# Altium PCB EMG_shield.PcbDoc (part 2 of 3)
Units mm, origin at the board's own origin, x right, y up, seen from the top; angles counter-clockwise.
Board outline 20.05 x 63.8 mm, 6 copper layers (Top Layer, GND/PWR1, SIG1, SIG2, GND/PWR2, Bottom Layer), stack 0.957 mm thick; 130 components, 175 nets, 615 pads, 662 vias.
Unrouted connection lines stored in the file: 5.
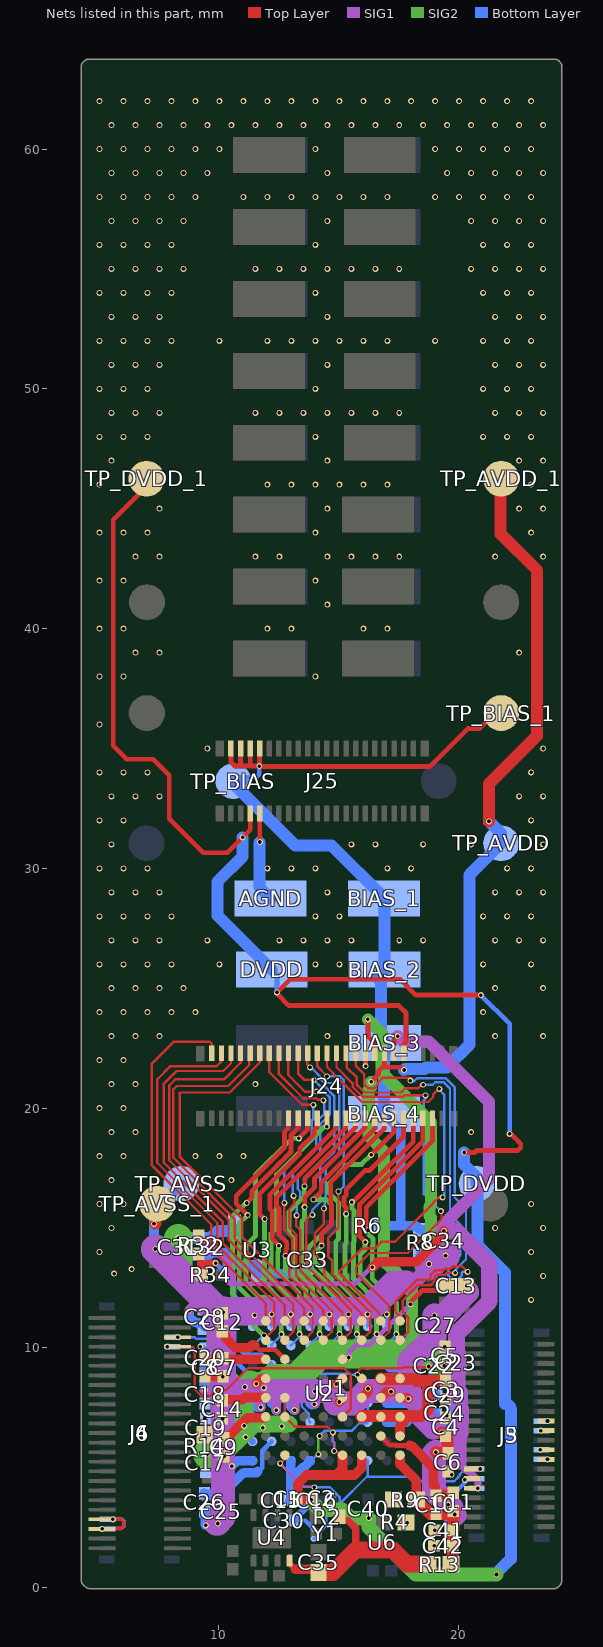
[diagram p6: the nets of this part, all layers, seen from the top]

## Via types
v1: diameter 0.25, hole 0.15, Top Layer to Bottom Layer, tented both sides, 585 vias
v2: diameter 0.25, hole 0.15, SIG2 to Bottom Layer, tented both sides, 41 vias
v3: diameter 0.25, hole 0.15, Top Layer to SIG1, tented both sides, 33 vias
v4: diameter 0.25, hole 0.15, Top Layer to Bottom Layer, 2 vias
v5: diameter 0.25, hole 0.15, Top Layer to GND/PWR1, tented both sides, 1 vias

## Nets (pads, with @x,y where several pads share a name; then routed paths per layer and width w, separated by ;. In a path a pad name is that pad's centre, name@x,y a point inside that pad or via, vN(x,y) a via of type N, cw(c..) or ccw(c..) an arc to the next point about the centre after c; other vN are vias at no path point) (continued)
-1.5V: C35.1 R2.2 R13.2 U4.4 | length 8.5
  Top Layer w0.25: U4.4@12.947,1.125 12.947,1 13.172,0.775 13.175,0.775
  Top Layer w0.3: R2.2@15.022,2.95 15.022,2.9 15.122,2.8 15.375,2.8 15.7,2.475 15.7,1.575
  Top Layer w0.4: 13.175,0.775 14.021,0.775 14.15,0.646 C35.1@14.15,0.625
  Top Layer w0.7: C35.1@14.15,0.625 14.152,0.627 14.752,0.627 15.7,1.575 17.253,1.575 17.839,0.989 18.71,0.989 18.718,0.981 R13.2@18.718,0.975
A_IN1N: J24.2 U1.H2 | length 16.4
  Top Layer w0.1: J24.2@10.1,22.29 10.1,21.941 9.909,21.75 7.975,21.75 7.425,21.2 7.425,17.724 9.929,15.221 9.929,14.274 12.3,11.902 12.3,10.78 11.9,10.38 11.9,10.375 U1.H2@11.95,10.325
A_IN1P: J24.1 U1.H1 | length 16
  Top Layer w0.1: J24.1@9.7,22.29 9.7,22.682 9.607,22.775 8.125,22.775 7.188,21.838 7.188,17.631 9.677,15.142 9.677,14.126 11.95,11.854 U1.H1@11.95,11.125
A_IN2N: J24.4 U1.G2 | length 16.7
  Top Layer w0.1: J24.4@10.9,22.29 10.9,21.893 10.207,21.2 8.177,21.2 7.925,20.948 7.925,17.825 10.339,15.411 10.398,15.352 10.398,14.524 13.1,11.821 13.1,10.675 U1.G2@12.75,10.325
A_IN2P: J24.3 U1.G1 | length 15.6
  Top Layer w0.1: J24.3@10.5,22.29 10.5,21.875 10.175,21.55 8.229,21.55 7.702,21.022 7.702,17.721 10.15,15.272 10.15,14.375 12.75,11.775 U1.G1@12.75,11.125
A_IN3N: J24.6 U1.F2 | length 17
  Top Layer w0.1: J24.6@11.7,22.29 11.7,21.901 10.449,20.65 8.382,20.65 8.358,20.626 8.358,17.985 10.978,15.365 10.978,14.605 13.9,11.683 13.9,10.675 U1.F2@13.55,10.325
A_IN3P: J24.5 U1.F1 | length 16
  Top Layer w0.1: J24.5@11.3,22.29 11.268,22.258 11.268,21.81 10.383,20.925 8.237,20.925 8.1,20.788 8.1,17.93 10.653,15.377 10.653,14.571 13.55,11.674 U1.F1@13.55,11.125
A_IN4N: J24.8 U1.E2 | length 14.7
  Top Layer w0.1: J24.8@12.5,22.29 12.5,21.579 12.5,21.421 13.511,20.41 14.052,20.41 14.108,20.354 14.322,20.354 v1(14.351,20.325) ; v1(13.114,16.341) 13.132,16.323 13.132,15.995 12.929,15.792 12.929,15.02 13.222,14.727 13.222,14.031 13.225,14.028 13.225,13.656 13.224,13.655 13.224,13.026 14.7,11.55 14.7,10.675 U1.E2@14.35,10.325
  Bottom Layer w0.1: v1(13.114,16.341) 13.081,16.373 13.081,17.325 14.05,18.294 14.05,19.414 14.388,19.753 14.388,20.313 14.376,20.325 v1(14.351,20.325)
A_IN4P: J24.7 U1.E1 | length 13.5
  Top Layer w0.1: J24.7@12.1,22.038 12.1,21.496 13.458,20.138 13.603,20.138 v1@13.938,20.138 ; v1(12.725,16.052) 12.725,14.915 13.047,14.593 13.047,13.959 13.05,13.956 13.05,13.728 13.047,13.725 13.047,13.656 12.929,13.537 12.929,12.997 14.35,11.576 U1.E1@14.35,11.125
  Top Layer w0.2: J24.7@12.1,22.038 J24.7@12.1,22.29
  Bottom Layer w0.1: v1(12.725,16.052) 12.725,17.504 13.875,18.654 13.875,19.487 13.938,19.55 v1(13.938,20.135)
A_IN5N: J24.10 U1.D2 | length 14.4
  Top Layer w0.1: J24.10@13.3,22.29 13.3,21.442 13.564,21.178 v1(13.958,21.178) ; v1(13.892,15.55) 13.85,15.55 13.85,15.539 13.839,15.539 13.635,15.335 13.635,13.448 15.5,11.584 15.5,10.675 U1.D2@15.15,10.325
  Bottom Layer w0.1: v1(13.892,15.55) 13.892,15.745 14.225,16.078 14.225,17.595 14.801,18.171 14.801,20.511 14.437,20.875 14.257,20.875 13.99,21.142 13.958,21.142 v1(13.958,21.178)
A_IN5P: J24.9 U1.D1 | length 13.8
  Top Layer w0.1: J24.9@12.89,22.285 12.89,22.179 12.89,21.388 13.6,20.677 14.051,20.677 v1(14.059,20.685) ; v1(13.242,15.525) 13.229,15.512 13.229,15.075 13.397,14.906 13.397,14.104 13.4,14.101 13.4,13.583 13.399,13.582 13.399,13.229 15.15,11.478 U1.D1@15.15,11.125
  Top Layer w0.2: J24.9@12.895,22.285 J24.9@12.9,22.29
  Bottom Layer w0.1: v1(13.242,15.525) 13.242,16.056 13.389,16.202 13.389,16.523 13.284,16.627 13.284,17.087 14.225,18.028 14.225,19.342 14.626,19.743 14.626,20.439 14.409,20.656 14.087,20.656 v1(14.059,20.685)
A_IN6N: J24.12 U1.C2 | length 13.9
  Top Layer w0.1: J24.12@14.1,22.29 14.09,22.28 14.09,21.751 14.491,21.35 14.491,21.34 v1(14.506,21.325) ; v1(14.986,16.524) 14.986,15.021 14.55,14.585 14.55,14.442 14.55,13.81 14.713,13.648 14.713,13.089 14.721,13.089 14.875,12.934 14.875,12.928 16.3,11.503 16.3,10.675 U1.C2@15.95,10.325
  Bottom Layer w0.1: v1(14.506,21.325) 15.045,21.325 15.2,21.17 15.2,16.738 v1(14.986,16.524)
A_IN6P: J24.11 U1.C1 | length 13.4
  Top Layer w0.1: J24.11@13.7,22.29 13.676,22.266 13.676,21.821 13.772,21.725 13.772,21.714 v1@13.815,21.671 ; v1(14.376,15.815) 14.376,15.173 14,14.796 14,13.904 14.4,13.504 14.385,13.489 14.385,12.99 15.95,11.425 U1.C1@15.95,11.125
  Bottom Layer w0.1: v1(13.797,21.697) 13.797,21.643 13.815,21.625 13.912,21.625 14.231,21.305 14.231,21.211 14.392,21.05 14.487,21.05 14.953,21.05 15.011,20.991 15.011,18.121 14.458,17.568 14.458,16.218 14.405,16.165 14.405,15.844 v1(14.376,15.815)
A_IN7N: J24.14 U1.B2 | length 18.6
  Top Layer w0.1: J24.14@14.9,22.29 14.9,21.707 15.575,21.032 15.575,20.89 15.99,20.475 17.668,20.475 17.723,20.53 18.569,20.53 v1(18.611,20.53) ; U1.B2@16.75,10.325 17.1,10.675 17.1,11.746 15.715,13.131 15.715,13.386 16.285,13.956 17.871,13.956 19.278,15.363 19.278,15.703 19.275,15.7 v1(19.254,15.7)
  Bottom Layer w0.1: v1(18.611,20.53) 18.576,20.495 18.623,20.448 18.623,20.402 18.546,20.325 18.546,16.409 v1(19.254,15.7)
A_IN7P: J24.13 U1.B1 | length 19.2
  Top Layer w0.1: J24.13@14.5,22.29 14.506,22.284 14.506,21.711 14.617,21.6 14.62,21.6 14.781,21.439 14.781,21.436 15.4,20.817 15.962,20.255 18.725,20.255 18.943,20.472 18.943,20.586 19.156,20.8 v1(19.189,20.8) ; U1.B1@16.75,11.125 16.693,11.182 16.693,11.43 15.023,13.1 15.023,13.211 15.962,14.15 15.985,14.15 15.981,14.146 15.988,14.138 16.216,14.138 16.227,14.15 16.504,14.15 16.775,14.421 17.328,14.421 18.931,16.023 18.931,16.041 19.165,16.275 v1(19.325,16.275)
  Bottom Layer w0.1: v1(19.189,20.8) 19.189,20.765 19.401,20.553 19.401,16.351 v1(19.325,16.275)
A_IN8N: J24.16 U1.A2 | length 18.7
  Top Layer w0.1: J24.16@15.7,22.29 15.7,21.773 16.053,21.421 16.053,21 16.228,20.825 16.466,20.825 16.622,20.981 16.622,21.052 16.845,21.275 17.958,21.275 17.983,21.25 v1(17.983,21.15) ; U1.A2@17.55,10.325 17.9,10.675 17.9,11.27 17.665,11.505 17.665,11.979 18.306,12.619 18.835,12.619 18.994,12.778 18.994,12.968 19.082,13.056 19.428,13.056 19.502,13.129 v1(19.85,13.13)
  Bottom Layer w0.1: v1(17.983,21.15) 18.033,21.2 18.108,21.125 18.141,21.125 18.266,21.25 18.708,21.25 19.45,21.25 19.826,20.874 19.826,16.281 20.3,15.807 20.3,13.699 19.879,13.277 19.879,13.158 v1(19.85,13.13)
A_IN8P: J24.15 U1.A1 | length 19.8
  Top Layer w0.1: J24.15@15.324,22.29 15.324,21.701 15.75,21.275 15.75,20.962 16.062,20.65 17.596,20.65 17.771,20.825 18.306,20.825 18.487,21.006 v1(18.518,20.975) ; U1.A1@17.55,11.125 17.55,11.305 17.344,11.511 17.344,11.922 18.272,12.85 18.819,12.85 18.819,13.041 19.009,13.231 19.356,13.231 19.429,13.304 19.636,13.304 19.736,13.405 20.128,13.405 20.358,13.175 v1(20.371,13.175)
  Top Layer w0.2: J24.15@15.3,22.29 J24.15@15.31,22.28
  Bottom Layer w0.1: v1(18.518,20.975) 18.918,20.975 19.018,21.075 19.378,21.075 19.636,20.816 19.636,15.564 20.066,15.134 20.066,13.864 19.568,13.365 19.568,13 19.579,13.012 19.736,12.855 19.738,12.855 19.966,12.854 20.127,13.016 20.127,13.134 20.168,13.175 v1(20.371,13.175)
A_VCAP1: C14.1 U1.H5 | length 1.9
  Top Layer w0.4: C14.1@10.142,7.819 10.158,7.835 10.978,7.835 11.089,7.945 11.93,7.945 U1.H5@11.95,7.925
A_VCAP2: C9.1 U1.H6 | length 2.1
  Top Layer w0.4: C9.1@10.206,6.275 10.228,6.298 10.398,6.298 11.195,7.095 11.92,7.095 U1.H6@11.95,7.125
A_VCAP3: C10.1 C11.1 U1.B7 | length 4.8
  Top Layer w0.2: U1.B7@16.75,6.325 17.125,5.95 17.359,5.95 17.384,5.925 17.716,5.925 17.719,5.929 17.946,5.929
  Top Layer w0.4: 17.946,5.929 17.95,5.925 18.027,5.925 18.931,5.021 18.931,4.301 19.014,4.218 19.014,3.865 C10.1@19.05,3.829 19.05,3.85 19.086,3.886 19.729,3.886 19.775,3.932 C11.1@19.775,3.954
A_VCAP4: C12.1 U1.G3 | length 3.3
  Top Layer w0.2: 11.486,10.114 11.675,9.925 12.35,9.925 U1.G3@12.75,9.525
  Top Layer w0.4: C12.1@10.142,10.69 10.178,10.654 10.178,10.632 10.278,10.533 10.278,10.41 10.688,10 11.268,10 11.382,10.114 11.486,10.114
A_VREFP: C7.1 C8.1 U1.H3 | length 2.6
  Top Layer w0.4: C8.1@9.417,9.572 9.417,9.561 9.453,9.525 U1.H3@11.95,9.525
A_WCT: C13.1 U1.D3 | length 5.8
  Top Layer w0.2: U1.D3@15.15,9.525 15.188,9.563 15.365,9.563 15.402,9.6 v3(15.415,9.6) ; v3(17.985,11.815) 17.985,11.907 18.472,12.394 19.278,12.394 C13.1@19.484,12.6
  SIG1 w0.2: v3(15.415,9.6) 15.425,9.61 15.425,9.833 15.717,10.125 16.296,10.125 v3(17.985,11.815)
ADS_A_DR: J4.22 J6.22 U1.D6 | length 11.6
  Top Layer w0.1: J4.22@8.275,10.05 8.301,10.024 8.918,10.024 8.95,9.991 8.95,9.829 8.991,9.788 8.991,8.273 9.298,7.966 9.583,7.966 9.844,8.226 10.284,8.226 11.208,9.15 15.22,9.15 15.5,8.87 15.5,7.475 U1.D6@15.15,7.125
  other v1: 7.85,10.05
ADS_B_DR: J4.23 J6.23 U2.D6 | length 8.2
  Bottom Layer w0.1: J6.23@8.055,10.45 v1(8.275,10.45) 8.976,10.45 9.046,10.38 9.715,10.38 9.95,10.145 9.95,8.9 10.8,8.05 13.145,8.05 13.45,7.745 13.45,7.555 13.755,7.25 13.755,6.945 U2.D6@13.8,6.9
ADS_BIAS: R32.2 R34.1 U2.B3 | length 7.3
  Top Layer w0.3: R32.2@9.15,13.921 9.236,13.835 9.236,13.43 ; R34.1@9.275,13.05 9.236,13.089 9.236,13.43 ; v1(9.86,13.536) 9.525,13.536 9.328,13.339 9.236,13.43
  Bottom Layer w0.2: v1(9.86,13.536) 10.625,12.771 10.625,10.2 11.125,9.7 11.8,9.7 U2.B3@12.2,9.3
AGND: AGND.37 C3.2 C4.1 C5.2 C6.1 C17.2 C18.1 C19.2 C20.1 C41.1 C42.1 J24.17 J25.34 R4.1 R9.2 | length 5.1
  Top Layer w0.18: v5(19.41,10.052) 19.423,10.052 C5.2@19.425,10.054 ; C4.1@19.45,7.082 19.459,7.091 19.459,7.134 v3(19.5,7.175) ; C3.2@19.45,7.871 v3(19.45,7.9) ; C6.1@19.55,4.846 19.567,4.846 v1(19.7,4.714)
  Top Layer w0.2: v1(11.7,31.1) J25.34@11.7,32.29 ; J24.17@16.099,22.366 16.106,22.359 16.106,21.756 v1(16.112,21.75)
  Top Layer w0.45: R9.2@17.271,3.675 v1(17.275,3.675) ; R4.1@17.8,2.725 17.825,2.725 v1(17.85,2.7) ; C42.1@18.968,1.75 v1(18.975,1.75) ; C41.1@18.996,2.4 v1(19,2.4)
  Bottom Layer w0.18: v1(9.225,10.055) 9.238,10.041 9.348,10.041 C20.1@9.417,9.972 ; v1(9.4,7.075) 9.421,7.054 C19.2@9.45,7.054 ; C18.1@9.417,7.683 9.417,7.658 v1(9.425,7.65)
  Bottom Layer w0.5: v1@11.684,31.084 11.684,29.216 AGND.37@12.15,28.75
  other v1: 23.018,12 23.518,13 5.625,13.1 6.358,13.285 5.018,14 23.018,14 5.518,15 21.518,15 23.518,15 5.018,16 6.018,16 23.018,16 5.518,17 10.518,17 5.018,18 6.018,18 9.018,18 10.018,18 11.018,18 5.518,19 6.518,19 20.518,19 5.018,20 6.018,20 5.518,21 6.518,21 11.518,21 5.018,22 6.018,22 5.518,23 6.518,23 7.518,23 14.518,23 21.518,23 23.518,23 5.018,24 6.018,24 7.018,24 8.018,24 9.018,24 21.018,24 5.518,25 6.518,25 7.518,25 8.518,25 21.518,25 23.518,25 5.018,26 6.018,26 7.018,26 8.018,26 10.018,26 14.018,26 15.018,26 21.018,26 23.018,26 5.518,27 6.518,27 7.518,27 9.518,27 12.518,27 13.518,27 14.518,27 15.518,27 17.518,27 18.518,27 21.518,27 22.518,27 23.518,27 5.018,28 6.018,28 7.018,28 8.018,28 14.018,28 15.018,28 21.018,28 22.018,28 23.018,28 5.518,29 6.518,29 7.518,29 14.518,29 21.518,29 22.518,29 23.518,29 5.018,30 6.018,30 7.018,30 12.018,30 13.018,30 14.018,30 17.018,30 18.018,30 22.018,30 23.018,30 5.518,31 15.518,31 16.518,31 18.518,31 20.518,31 23.518,31 5.018,32 6.018,32 23.018,32 5.518,33 6.518,33 7.518,33 22.518,33 23.518,33 5.018,34 6.018,34 7.018,34 23.018,34 9.518,35 23.518,35 5.018,36 5.018,38 6.018,38 14.018,38 6.518,39 7.518,39 22.518,39 5.018,40 6.018,40 12.018,40 13.018,40 16.018,40 17.018,40 14.518,41 5.018,42 6.018,42 14.018,42 6.518,43 7.518,43 11.518,43 12.518,43 14.518,43 15.518,43 16.518,43 17.518,43 21.518,43 23.518,43 5.018,44 6.018,44 7.018,44 14.018,44 23.018,44 7.518,45 14.518,45 22.518,45 23.518,45 5.018,46 12.018,46 13.018,46 14.018,46 15.018,46 16.018,46 17.018,46 23.018,46 5.518,47 14.518,47 22.518,47 23.518,47 5.018,48 6.018,48 7.018,48 14.018,48 21.018,48 22.018,48 23.018,48 5.518,49 6.518,49 7.518,49 11.518,49 12.518,49 13.518,49 14.518,49 15.518,49 16.518,49 17.518,49 21.518,49 22.518,49 23.518,49 5.018,50 6.018,50 7.018,50 14.018,50 21.018,50 22.018,50 23.018,50 5.518,51 6.518,51 7.518,51 14.518,51 21.518,51 22.518,51 23.518,51 5.018,52 6.018,52 7.018,52 8.018,52 10.018,52 12.018,52 13.018,52 14.018,52 15.018,52 16.018,52 17.018,52 19.018,52 21.018,52 22.018,52 23.018,52 5.518,53 6.518,53 7.518,53 14.518,53 21.518,53 22.518,53 23.518,53 5.018,54 6.018,54 7.018,54 8.018,54 14.018,54 21.018,54 22.018,54 23.018,54 5.518,55 6.518,55 7.518,55 8.518,55 11.518,55 12.518,55 13.518,55 14.518,55 15.518,55 16.518,55 17.518,55 20.518,55 21.518,55 22.518,55 23.518,55 5.018,56 6.018,56 7.018,56 8.018,56 14.018,56 21.018,56 22.018,56 23.018,56 5.518,57 6.518,57 7.518,57 8.518,57 14.518,57 20.518,57 21.518,57 22.518,57 23.518,57 5.018,58 6.018,58 7.018,58 8.018,58 9.018,58 11.018,58 12.018,58 13.018,58 14.018,58 15.018,58 16.018,58 17.018,58 19.018,58 20.018,58 21.018,58 22.018,58 23.018,58 5.518,59 6.518,59 7.518,59 8.518,59 9.518,59 14.518,59 19.518,59 20.518,59 21.518,59 22.518,59 23.518,59 5.018,60 6.018,60 7.018,60 8.018,60 9.018,60 10.018,60 14.018,60 19.018,60 20.018,60 21.018,60 22.018,60 23.018,60 5.518,61 6.518,61 7.518,61 8.518,61 9.518,61 10.518,61 11.518,61 12.518,61 13.518,61 14.518,61 15.518,61 16.518,61 17.518,61 18.518,61 19.518,61 20.518,61 21.518,61 22.518,61 23.518,61 5.018,62 6.018,62 7.018,62 8.018,62 9.018,62 10.018,62 11.018,62 12.018,62 13.018,62 14.018,62 15.018,62 16.018,62 17.018,62 18.018,62 19.018,62 20.018,62 21.018,62 22.018,62 23.018,62
AVDD: C3.1 C5.1 C17.1 C19.1 C31.1 C32.1 J24.19 R14.1 TP_AVDD.41 TP_AVDD_1.41 U1.A4 U1.A6 U1.A7 U1.B4 U1.B6 U1.C6 U2.A4 U2.A6 U2.A7 U2.B4 U2.B6 U2.C6 U3.1 | length 81.1
  Top Layer w0.2: v1(16.347,21.1) 16.65,21.403 16.65,21.539 16.812,21.701 ; J24.19@16.9,22.29 16.9,21.789 16.812,21.701 ; v1(17.72,21.59) 17.609,21.701 16.9,21.701 16.812,21.701
  Top Layer w0.3: U1.C6@15.95,7.098 U1.C6@15.95,7.125 ; U1.B6@16.75,7.098 U1.B6@16.75,7.125 ; U1.A7@17.55,6.325 U1.A7@17.569,6.344 ; U1.A6@17.55,7.098 U1.A6@17.55,7.125 ; U1.A4@17.55,8.725 U1.A4@17.569,8.706
  Top Layer w0.4: U1.A7@17.55,6.325 17.55,6.75 17.95,7.15 ; C5.1@19.437,9.284 19.437,8.641 C3.1@19.45,8.629
  Top Layer w0.5: U1.C6@15.95,7.125 15.975,7.15 17.95,7.15 18.432,7.15 18.725,7.443 18.725,8.379 18.975,8.629 ; U1.B4@16.75,8.725 16.775,8.7 18.175,8.7 18.246,8.629 18.975,8.629 ; C3.1@19.45,8.629 18.975,8.629 ; v1(21.26,31.96) 21.26,33.524 23.261,35.525 23.266,35.525 23.266,42.426 21.742,43.95 21.742,46.098 TP_AVDD_1.41@21.844,46.2
  SIG2 w0.5: v1(9.425,6.225) 9.425,5.656 v2(9.506,5.575) ; v1(16.347,21.1) 16.347,20.867 16.243,20.763 16.243,18.823 16.875,18.191 16.875,14.139 16.837,14.102 16.837,13.688 18.05,12.475 18.05,10.55 18.85,9.75
  SIG2 w0.7: v2@11.125,6.825 12.925,6.825 ; 11.306,8.45 11.753,8.45
  SIG2 w1.2: v2(8.3,14.575) 8.3,13.175 10.075,11.4 10.075,8.744 10.838,7.981 ; v2(9.506,5.575) 9.875,5.575 v2(11.05,6.75) v2@11.125,6.825 ; 10.838,6.825 10.838,7.981 ; 11.306,8.45 10.838,7.981 ; v2(11.867,8.336) 12.256,8.725 13.225,8.725 14.25,9.75 18.85,9.75 v1@19.346,9.254
  Bottom Layer w0.3: v2(11.05,6.75) 11.181,6.881 11.381,6.881 U2.A6@11.4,6.9 ; v2(11.082,8.368) 11.268,8.368 U2.A4@11.4,8.5 ; v2(11.109,6.278) 11.222,6.278 U2.A7@11.4,6.1 ; v2(11.825,6.675) 12.05,6.9 U2.B6@12.2,6.9 ; v2(11.867,8.336) 12.031,8.5 U2.B4@12.2,8.5 ; v2(12.625,6.725) 12.798,6.725 12.973,6.9 U2.C6@13,6.9
  Bottom Layer w0.4: v2(8.3,14.575) C31.1@8.3,14.579
  Bottom Layer w0.5: v2(8.3,14.575) 8.304,14.579 C32.1@9.4,14.579 9.408,14.586 9.657,14.586 9.95,14.879 10.631,14.879 10.65,14.898 U3.1@10.65,14.93 ; v1(9.425,6.225) 9.436,6.214 9.436,5.586 9.444,5.579 C17.1@9.45,5.579 9.45,5.575 v2(9.506,5.575) ; v1(17.72,21.59) 17.755,21.625 18.565,21.625 18.64,21.7 19.504,21.7 20.447,22.643 20.447,29.729 TP_AVDD.41@21.768,31.05 21.768,31.452 v1(21.26,31.96)
  other v1: 19.401,9.254
AVSS: C4.2 C6.2 C7.2 C8.2 C9.2 C10.2 C11.2 C12.2 C13.2 C14.2 C18.2 C20.2 C22.2 C23.2 C24.2 C25.2 C26.2 C27.2 C28.2 C29.2 C31.2 C32.2 C33.2 C34.2 C41.2 C42.2 J3.30 J5.30 J24.18 R8.1 R9.1 R13.1 TP_AVSS.42 TP_AVSS_1.42 U1.A5 U1.A8 U1.B5 U1.C5 U1.D4 U1.D5 U1.H4 U2.A5 U2.A8 U2.B5 U2.C5 U2.D4 U2.D5 U2.H4 U3.3 | length 98.7
  Top Layer w0.18: v1(20.25,4.5) 20.26,4.5 20.31,4.55 J3.30@20.56,4.55
  Top Layer w0.2: v1(16.21,23.7) 16.21,23 16.5,22.71 J24.18@16.5,22.29
  Top Layer w0.4: v1(7.29,15.175) 7.348,15.117 7.4,15.17 TP_AVSS_1.42@7.4,15.988 ; C8.2@9.4,8.798 C8.2@9.417,8.815 10.135,8.815 v3(10.15,8.8) ; C14.2@10.106,7.119 10.142,7.083 C14.2@10.142,7.061 10.142,7.058 v3(10.15,7.05) ; C12.2@10.142,11.447 10.175,11.48 v3(10.175,11.486) ; C9.2@10.192,5.461 C9.2@10.192,5.483 10.217,5.483 v3(10.225,5.475) ; v3(11.55,8.5) 11.775,8.725 U1.H4@11.95,8.725 ; v3(14.897,8.484) 14.909,8.484 U1.D4@15.15,8.725 ; v3(15.023,7.742) 15.15,7.87 U1.D5@15.15,7.925 ; U1.C5@15.95,7.925 16.215,8.19 v3(16.215,8.301) ; U1.B5@16.75,7.925 17,8.175 v1(17.175,8.175) ; U1.A8@17.55,5.525 17.55,5.15 18.229,4.471 R9.1@18.229,3.675 ; U1.A5@17.55,7.925 17.85,7.925 v3(17.9,7.875) ; C13.2@20.316,12.6 v3(20.325,12.6)
  Top Layer w0.5: R9.1@18.229,3.675 18.25,3.675 18.336,3.589 18.336,3.553 18.811,3.079 19.042,3.079 C10.2@19.05,3.071 19.058,3.079 19.652,3.079 C11.2@19.761,3.189 ; v3(19.042,5.652) 19.083,5.611 19.542,5.611 C6.2@19.55,5.604 19.544,5.604 19.536,5.611 19.536,6.245 19.456,6.325 C4.2@19.45,6.325 v1(19.3,6.474) ; R13.1@19.675,0.975 19.746,1.046 19.746,2.392 C41.2@19.754,2.4 19.754,2.406 19.775,2.428 C11.2@19.775,3.079 ; C11.2@19.775,3.196 19.825,3.146 v3(19.825,3.05)
  SIG1 w0.4: v1(8.757,11.551) 9.143,11.937 9.537,11.937 ; v1(9.412,8.241) 9.666,8.241 v3@10.15,8.725 ; 11.675,8.2 11.76,8.115 11.76,7.825 11.746,7.81 v1(11.746,7.52) ; 12.325,8.2 12.389,8.136 v1(12.389,7.4) ; 13.125,8.2 13.15,8.175 v1(13.15,7.4) ; v1(13.975,7.65) 14.003,7.678 v1@14.003,8.072
  SIG1 w0.5: 18.95,6.675 19.099,6.675 v1(19.3,6.474)
  SIG1 w0.6: 17.825,12.925 17.2,12.925 15.8,11.525 16.55,11.525 17.55,12.525 17.925,12.525 18.575,13.175 18.575,13.24 v1@18.76,13.425
  SIG1 w1: v1@9.875,2.675 v1(9.95,2.675) 10.175,2.9 10.175,5.45 10.15,5.475 v3(10.15,7.05) v3@10.15,8.725 ; v3(10.15,8.8) v3@10.15,8.725 ; 14.85,7.675 15.603,7.675 16.128,8.2 17.825,8.2 18.388,7.637 18.388,7.237 18.95,6.675 ; v3(15.023,7.742) 14.565,8.2 13.125,8.2 12.325,8.2 11.675,8.2 10.675,8.2 v3@10.15,8.725 ; 17.925,8.1 17.925,9.425 18.983,10.483 v1(18.983,11.359) ; v3(19.042,5.652) 18.975,5.585 18.975,4.04 v1(19.554,3.461) ; 19.2,11.175 20.35,12.325 ; v1@19.559,3.466 v1(19.554,3.461) ; v3(19.825,3.05) 19.69,3.185 19.69,3.326 v1(19.554,3.461)
  SIG1 w1.2: v1(7.35,14.125) 9.925,11.55 v3@10.214,11.55 ; v3@10.1,8.85 v3@10.1,11.4 ; v3@10.214,11.525 15.8,11.525 ; v1(18.76,13.5) 18.76,13.425 19.185,13.85 v1(19.448,13.85)
  SIG2 w0.5: v1(16.21,23.7) 16.56,23.35 16.575,23.35 16.775,23.15 16.775,21.485 18.85,19.41 18.85,15.968 18.779,15.897 18.779,15.503 18.85,15.432 18.85,14.625 19.448,14.027 v1(19.448,13.85)
  Bottom Layer w0.18: v1(19.554,3.461) 19.568,3.475 19.568,3.686 20.431,4.55 J5.30@20.745,4.55 ; v1(20.25,4.5) 20.269,4.5 20.294,4.525 J5.30@20.505,4.525
  Bottom Layer w0.4: TP_AVSS.42@8.458,16.825 8.317,16.684 7.29,15.657 7.29,15.025 7.29,14.185 7.412,14.062 7.438,14.062 7.475,14.025 7.935,14.025 7.939,14.021 8.101,14.021 C31.2@8.3,13.821 C32.2@9.4,13.821 9.4,13.843 9.436,13.879 9.601,13.879 9.684,13.961 10.239,13.961 10.736,13.464 11.536,13.464 11.6,13.401 11.6,13.1 13.5,13.1 13.642,13.242 13.664,13.242 13.7,13.279 C33.2@13.7,13.3 ; v1(8.757,11.551) 8.757,11.288 8.97,11.075 9.06,11.075 9.11,11.025 9.294,11.025 9.4,10.919 C28.2@9.4,10.884 ; C26.2@9.392,3.186 9.428,3.15 9.428,2.622 v1(9.45,2.6) ; v1(9.412,8.241) 9.417,8.246 C18.2@9.417,8.44 C20.2@9.417,9.215 ; v1(9.95,2.675) 9.975,2.675 C25.2@10.1,2.8 ; v1(10.533,5.067) 10.767,5.3 U2.A8@11.4,5.3 ; U2.A5@11.4,7.7 11.58,7.52 v1(11.746,7.52) ; U2.B5@12.2,7.7 12.389,7.511 v1(12.389,7.4) ; U2.C5@13,7.7 13,7.55 v1(13.15,7.4) ; U2.D4@13.8,8.5 14.003,8.297 v1(14.003,8.185) ; U2.D5@13.876,7.624 U2.D5@13.8,7.7 13.85,7.65 v1(13.975,7.65) ; U2.H4@17,8.5 17.175,8.325 v1(17.175,8.175) ; R8.1@18.4,13.875 R8.1@18.425,13.875 ; v1(18.76,13.5) 18.76,13.54 R8.1@18.425,13.875 ; v1(18.983,11.359) 18.992,11.35 19.011,11.35 C27.2@19.042,11.319 ; C34.2@19.196,13.875 R8.1@18.425,13.875 ; C34.2@19.4,14.079 19.436,14.042 19.436,13.862 v1(19.448,13.85)
  Bottom Layer w0.5: C22.2@18.975,8.875 18.983,8.867 19.115,8.867 19.204,8.779 19.772,8.779 19.894,8.9 C23.2@19.9,8.9 ; v1(19.3,6.474) 19.824,6.999 C29.2@19.824,8.04 C23.2@19.824,8.83
B_IN1N: J24.27 U2.H2 | length 11.5
  Top Layer w0.2: v1(16.225,14.916) 16.215,14.926 16.215,15.18 16.14,15.256 16.14,15.868 18.9,18.628 J24.27@18.9,19.725
  SIG2 w0.2: v1(16.225,14.916) 16.225,14.75 16.425,14.55 16.425,14.29 16.393,14.258 16.393,12.893 17.4,11.886 v2(17.4,10.575)
  Bottom Layer w0.1: U2.H2@17,10.1 17,10.137 17.4,10.537 v2(17.4,10.575)
B_IN1P: J24.28 U2.H1 | length 10.6
  Top Layer w0.2: v1(16.1,14.413) 16.1,14.427 15.865,14.662 15.865,15.982 18.5,18.617 J24.28@18.5,19.744
  SIG2 w0.2: v1(16.1,14.413) 16.09,14.404 16.09,14.092 15.887,13.888 15.887,13.01 17,11.897 v2(17,11.4)
  Bottom Layer w0.1: U2.H1@17,10.9 v2(17,11.4)
B_IN2N: J24.29 U2.G2 | length 11.3
  Top Layer w0.2: v1(15.54,16.075) 15.569,16.075 18.1,18.606 J24.29@18.1,19.679
  SIG2 w0.2: v1(15.54,16.075) 15.549,16.065 15.549,15.808 15.632,15.726 15.632,14.407 15.612,14.387 15.612,12.896 16.575,11.933 v2(16.575,10.575)
  Bottom Layer w0.1: U2.G2@16.2,10.1 16.2,10.159 16.575,10.534 v2(16.575,10.575)
B_IN2P: J24.30 U2.G1 | length 10.4
  Top Layer w0.2: v1(15.307,15.591) 15.297,15.601 15.297,15.854 15.215,15.936 15.215,16.282 15.311,16.378 15.311,16.62 16.091,17.401 16.284,17.401 17.7,18.816 J24.30@17.7,19.75
  SIG2 w0.2: v1(15.307,15.591) 15.307,14.359 15.257,14.309 15.257,13.091 15.337,13.01 15.337,12.782 16.2,11.92 v2(16.2,11.4)
  Bottom Layer w0.1: U2.G1@16.2,10.9 v2(16.2,11.4)
B_IN3N: J24.31 U2.F2 | length 11.8
  Top Layer w0.2: v1(16.343,18.051) 16.677,18.386 17.3,19.008 J24.31@17.3,19.725
  SIG2 w0.2: v2(15.75,10.575) 15.75,11.981 15.062,12.669 15.062,12.896 14.868,13.09 14.868,14.429 14.982,14.542 14.982,16.068 14.573,16.477 14.573,16.848 15.375,17.65 15.942,17.65 v1(16.343,18.051)
  Bottom Layer w0.1: U2.F2@15.4,10.1 15.721,10.421 15.721,10.546 v2(15.75,10.575)
B_IN3P: J24.32 U2.F1 | length 10.7
  Top Layer w0.2: v1(14.275,14.265) 14.275,14.753 14.701,15.18 14.701,15.96 14.661,16 14.661,16.906 16.89,19.135 J24.32@16.89,19.777
  SIG2 w0.2: v1(14.275,14.265) 14.275,14.252 14,13.977 14,13.57 14.725,12.845 14.725,12.617 15.4,11.942 v2(15.4,11.4)
  Bottom Layer w0.1: U2.F1@15.4,10.9 v2(15.4,11.4)
B_IN4N: J24.33 U2.E2 | length 12.3
  Top Layer w0.2: v1(13.941,16.191) 14.262,16.511 14.262,16.895 16.518,19.152 16.518,19.562 J24.33@16.5,19.58
  SIG2 w0.2: v1(13.941,16.191) 14.47,16.191 14.707,15.954 14.707,15.157 13.725,14.175 13.725,13.456 14.45,12.731 14.45,12.503 15.025,11.928 v2(15.025,10.575)
  Bottom Layer w0.1: U2.E2@14.6,10.1 14.6,10.125 15.025,10.55 v2(15.025,10.575)
B_IN4P: J24.34 U2.E1 | length 10.3
  Top Layer w0.2: v1(13.569,15.871) 13.579,15.881 13.579,16.288 13.987,16.696 13.987,17.074 16.09,19.178 J24.34@16.09,19.635
  SIG2 w0.2: v1(13.569,15.871) 13.538,15.871 13.567,15.842 13.567,15.39 13.45,15.273 13.45,15.095 13.45,13.342 14.175,12.617 14.175,12.389 14.6,11.964 v2(14.6,11.4)
  Bottom Layer w0.1: U2.E1@14.6,10.9 v2(14.6,11.4)
B_IN5N: J24.35 U2.D2 | length 11.4
  Top Layer w0.2: v1(13.566,16.734) 13.575,16.744 13.575,17.066 15.69,19.18 J24.35@15.69,19.661
  SIG2 w0.2: v1(13.566,16.734) 13.556,16.725 13.556,16.318 12.917,15.679 12.917,14.789 13.147,14.559 13.147,13.256 13.9,12.503 13.9,12.275 14.2,11.975 v2(14.2,10.575)
  Bottom Layer w0.1: U2.D2@13.8,10.1 13.8,10.137 14.2,10.537 v2(14.2,10.575)
B_IN5P: J24.36 U2.D1 | length 10.5
  Top Layer w0.2: v1(12.775,13.842) 12.785,13.852 12.785,14.088 12.822,14.126 12.822,14.398 12.5,14.72 12.5,15.817 12.4,15.917 12.4,16.279 15.29,19.169 15.29,19.57 J24.36@15.3,19.58
  SIG2 w0.2: v1(12.775,13.842) 12.775,13.239 13.625,12.389 13.625,12.066 13.8,11.891 v2(13.8,11.4)
  Bottom Layer w0.1: U2.D1@13.8,10.9 v2(13.8,11.4)
B_IN6N: J24.37 U2.C2 | length 11.4
  Top Layer w0.2: v1(12.497,14.26) 12.497,14.274 12.225,14.546 12.225,15.703 12.125,15.803 12.125,16.393 14.89,19.158 J24.37@14.89,19.708
  SIG2 w0.2: v1(12.497,14.26) 12.488,14.251 12.488,14.037 12.45,14 12.45,13.735 12.45,13.175 13.35,12.275 v2(13.35,10.575)
  Bottom Layer w0.1: U2.C2@13,10.1 13.321,10.421 13.321,10.546 v2(13.35,10.575)
B_IN6P: J24.38 U2.C1 | length 10
  Top Layer w0.2: v1(14.5,19.228) J24.38@14.5,19.58
  SIG2 w0.2: v2(13,11.4) 13,12.051 12.172,12.879 12.172,14.395 12.175,14.398 12.175,14.785 12.4,15.01 12.4,17.228 14.399,19.228 v1(14.5,19.228)
  Bottom Layer w0.1: U2.C1@13,10.9 v2(13,11.4)
B_IN7N: J24.39 U2.B2 | length 11
  Top Layer w0.2: v1(11.9,15.375) 11.696,15.579 11.696,16.424 13.37,18.098 13.37,18.324 13.965,18.919 13.965,19.09 14.09,19.215 14.09,19.57 J24.39@14.1,19.58
  SIG2 w0.2: v1(11.9,15.375) 11.9,14.683 11.897,14.68 11.897,12.679 12.6,11.976 v2(12.6,10.575)
  Bottom Layer w0.1: U2.B2@12.2,10.1 12.2,10.137 12.6,10.537 v2(12.6,10.575)
B_IN7P: J24.40 U2.B1 | length 10.7
  Top Layer w0.2: v1(13.328,18.741) 13.69,19.103 J24.40@13.69,19.667
  SIG2 w0.2: v2(12.2,11.4) 12.2,11.987 12.087,12.1 11.7,12.1 11.121,12.679 11.121,14.256 11.518,14.653 11.518,17.21 13.048,18.741 v1(13.328,18.741)
  Bottom Layer w0.1: U2.B1@12.2,10.9 v2(12.2,11.4)
B_IN8N: J24.41 U2.A2 | length 11.5
  Top Layer w0.2: v1(11.151,16.041) 11.151,16.055 11.38,16.284 11.38,16.555 12.445,17.62 12.445,17.629 12.796,17.98 12.805,17.98 13.003,18.178 13.003,18.875 13.29,19.163 J24.41@13.29,19.653
  SIG2 w0.2: v1(11.151,16.041) 11.114,16.041 10.559,15.486 10.559,12.241 11.075,11.725 11.075,11.3 11.85,10.525 v2(11.875,10.525)
  Bottom Layer w0.1: U2.A2@11.4,10.1 11.459,10.1 11.459,10.134 11.85,10.525 v2(11.875,10.525)
B_IN8P: J24.42 U2.A1 | length 10.3
  Top Layer w0.2: v1@11.177,15.555 v1(11.193,15.539) ; v1@11.177,15.556 10.719,16.014 10.719,16.341 12.728,18.35 12.728,18.989 12.89,19.152 J24.42@12.89,19.692
  SIG2 w0.2: v1(11.193,15.539) 10.846,15.192 10.846,12.504 11.486,11.864 v2(11.486,11.359)
  Bottom Layer w0.1: U2.A1@11.4,10.9 11.4,11.274 v2(11.486,11.359)
B_VCAP1: C29.1 U2.H5 | length 2.2
  Bottom Layer w0.4: U2.H5@17,7.7 17.835,7.7 18.175,8.04 C29.1@19.067,8.04
B_VCAP2: C24.1 U2.H6 | length 2.2
  Bottom Layer w0.4: U2.H6@17,6.9 17.826,6.9 18.181,7.255 19.028,7.255 C24.1@19.038,7.265
B_VCAP3: C25.1 C26.1 U2.B7 | length 4.4
  Bottom Layer w0.2: 11.613,4.848 11.655,4.848 11.8,4.993 11.8,5.7 U2.B7@12.2,6.1
  Bottom Layer w0.4: C26.1@9.392,3.944 9.392,3.922 9.428,3.886 9.887,3.886 C25.1@9.999,3.774 ; C25.1@10.1,3.557 10.136,3.593 10.136,3.911 11.025,4.8 11.565,4.8 11.613,4.848
B_VCAP4: C27.1 U2.G3 | length 3.4
  Bottom Layer w0.2: U2.G3@16.2,9.3 16.6,9.7 17.25,9.7 17.425,9.875 17.475,9.875
  Bottom Layer w0.4: 17.475,9.875 18.125,10.525 19.006,10.525 C27.1@19.042,10.561
B_VREFP: C22.1 C23.1 U2.H3 | length 3.2
  Bottom Layer w0.4: U2.H3@17,9.3 17.125,9.175 17.675,9.175 17.7,9.15 ; C23.1@19.801,9.75 19.894,9.657 C23.1@19.9,9.657
  Bottom Layer w0.5: 17.7,9.15 17.95,9.15 18.425,9.625 18.968,9.625 C22.1@18.975,9.632 18.981,9.632 19.099,9.75 C23.1@19.801,9.75
B_WCT: C28.1 U2.D3 | length 6.4
  Bottom Layer w0.2: C28.1@9.4,11.716 9.4,11.681 9.606,11.475 9.739,11.475 10.175,11.039 10.175,9.957 11.232,8.9 13.166,8.9 13.4,9.134 13.4,9.154 13.517,9.271 13.771,9.271 U2.D3@13.8,9.3
BIAS: BIAS_1.17 BIAS_2.18 BIAS_3.19 BIAS_4.20 C34.1 J3.32 J5.32 J24.20 J25.33 J25.35 J25.37 J25.39 R6.2 R8.2 R32.1 TP_BIAS.43 TP_BIAS_1.43 U1.C4 U2.C4 | length 86.9
  Top Layer w0.1: U1.C4@15.95,8.725 15.927,8.725 15.727,8.925 15.703,8.925 15.928,9.15 17.67,9.15 17.72,9.2 18.725,9.2 v3(18.75,9.225)
  Top Layer w0.2: J25.39@10.5,35 10.5,34.425 10.65,34.275 10.9,34.275 ; J25.37@10.9,35 10.9,34.275 ; J25.35@11.3,35 11.3,34.275 ; v1(11.679,34.262) v1@11.691,34.25 ; J25.33@11.691,34.96 v1@11.691,34.25 ; J24.20@17.3,22.608 17.3,22.85 v3(17.45,23) ; TP_BIAS_1.43@21.768,36.475 21.519,36.475 20.879,35.835 20.39,35.835 18.805,34.25 v1@11.691,34.25 ; 10.9,34.275 11.3,34.275 ; 11.3,34.275 11.666,34.275 v1@11.691,34.25
  Top Layer w0.4: R32.1@9.15,14.679 9.15,14.657 v3(9.326,14.481) ; v3(16.394,13.358) 16.63,13.594 18.241,13.594 19.375,14.729 v1(19.375,14.875)
  SIG1 w0.1: v3(18.75,9.225) 19.292,9.767 19.908,9.767
  SIG1 w0.2: 10.5,12.775 10.5,12.675 15.661,12.675 16.344,13.358 v3(16.394,13.358)
  SIG1 w0.3: 19.975,5.25 20.35,4.875 20.405,4.875 20.8,4.48 v1(20.8,4.15)
  SIG1 w0.4: v3(9.326,14.481) 9.443,14.365 9.443,14.207 9.568,14.082 9.915,14.082 10.353,13.644 10.353,13.177 10.5,13.029 10.5,12.775
  SIG1 w0.5: v3(17.45,23) 17.665,22.785 18.739,22.785 21.26,20.263 21.26,17.031 19.375,15.146 v1(19.375,14.875)
  SIG1 w0.7: v1(19.375,14.875) 19.875,14.875 21.275,13.475 21.275,11.942 19.908,10.574 19.908,9.767 19.976,9.698 19.976,9.015 19.925,8.964 19.925,8.238 20.025,8.138 20.025,7.512 20.075,7.462 20.075,6.875 20.05,6.85 20.05,6.421 19.975,6.346 19.975,5.25
  Bottom Layer w0.1: U2.C4@13,8.5 13.045,8.545 13.35,8.545 13.73,8.925 15.45,8.925 15.498,8.877 v1(15.775,8.877)
  Bottom Layer w0.2: TP_BIAS.43@10.516,33.71 10.977,33.71 11.066,33.8 11.55,33.8 11.679,33.929 v1(11.679,34.262)
  Bottom Layer w0.4: R6.2@16.7,15.1 17.58,15.1 ; BIAS_4.20@16.9,19.75 17.58,19.07 17.58,15.1 ; v1(19.375,14.875) 19.393,14.857 C34.1@19.4,14.857 ; C34.1@19.379,14.879 19.379,14.9 19.354,14.925 R8.2@18.4,14.925 18.375,14.925 18.2,15.1 17.58,15.1
  Bottom Layer w0.5: TP_BIAS.43@10.937,33.638 TP_BIAS.43@10.6,33.638 10.6,33.54 13.19,30.95 14.7,30.95 BIAS_1.17@16.9,28.75 ; BIAS_4.20@16.887,19.763 BIAS_3.19@16.887,22.36 ; BIAS_3.19@16.9,22.75 16.75,22.9 16.75,25.3 16.6,25.45 BIAS_2.18@16.9,25.75 ; BIAS_3.19@16.907,22.285 BIAS_3.19@16.907,22.662 ; BIAS_2.18@16.907,26.097 BIAS_1.17@16.907,28.73
CLK_EXT: J3.28 J5.28 U1.G8 U2.G8 Y1.2 | length 13
  Top Layer w0.1: v3(12.547,5.183) 12.75,5.386 U1.G8@12.75,5.525
  SIG1 w0.1: v3(12.547,5.183) 13.516,4.215 13.946,4.215 v1(13.975,4.186)
  Bottom Layer w0.1: Y1.2@13.95,2.04 14.475,2.565 14.475,2.938 15.031,3.494 ; v1(13.975,4.186) 14.628,4.186 15.031,3.783 15.031,3.494 ; U2.G8@16.2,5.3 16.2,4.663 16.162,4.625 ; v1(20.9,4.95) 20.265,4.95 20.039,4.724 20.039,4.678 19.975,4.614 19.975,4.6 19.814,4.439 18.1,4.439 17.914,4.625 16.2,4.625 16.162,4.625 ; 15.031,3.494 16.162,4.625
CSI_CLK_N: J3.17 J5.17
  other v1: 23.7,6.95
CSI_CLK_P: J3.19 J5.19
  other v1: 23.425,6.55
CSI_D0_N: J3.23 J5.23
  other v1: 23.4,5.75
CSI_D0_P: J3.25 J5.25
  other v1: 23.7,5.35
DVDD: C1.1 C2.1 C15.1 C16.1 C30.1 C40.1 DVDD.38 J24.21 J25.36 TP_DVDD.44 TP_DVDD_1.44 U1.C8 U1.D8 U1.G5 U1.G6 U2.C8 U2.D8 U2.G5 U2.G6 U6.A1 Y1.3 | length 104.3
  Top Layer w0.1: U1.G5@12.75,7.925 U1.G6@12.75,7.125 13.156,6.719 14.506,6.719 v3(14.75,6.475) ; v3(14.8,5.7) 14.829,5.671 14.923,5.671 15.069,5.525 U1.D8@15.15,5.525 U1.D8@15.093,5.582
  Top Layer w0.2: TP_DVDD_1.44@7.14,46.09 5.588,44.538 5.588,35.109 6.147,34.55 7.25,34.55 7.925,33.875 7.925,32.067 9.342,30.65 10.343,30.65 v1(10.989,31.296) 11.3,31.607 J25.36@11.3,32.29 ; J24.21@17.7,22.29 17.7,22.665 17.8,22.765 17.8,23.976 17.501,24.275 12.911,24.275 12.421,24.766 v1(12.421,24.825) 12.971,25.375 13.259,25.375 17.55,25.375 18.209,24.716 v1(20.922,24.716) ; v1(20.227,18.15) 20.667,18.15 20.752,18.235 21.776,18.235 22.166,18.235 22.468,18.235 22.585,18.353 22.585,18.518 22.444,18.66 ; v1(22.123,18.925) 22.148,18.95 22.153,18.95 22.444,18.66
  Top Layer w0.4: v1(13.85,3.675) 13.254,3.675 C1.1@13.229,3.7 13.25,3.7 13.286,3.736 13.286,4.336 13.65,4.7 14.875,4.7 ; U1.D8@15.15,5.525 15.15,4.975 14.875,4.7 ; U1.C8@15.95,5.525 15.95,5 15.65,4.7 14.875,4.7
  SIG1 w0.1: v3(14.75,6.475) 14.75,6.127 14.8,6.077 v3(14.8,5.7)
  SIG2 w0.1: v2(14.142,5.558) 14.142,6.226 14.2,6.284 v2(14.2,6.325)
  SIG2 w0.6: v1(13.85,3.675) 13.85,3.601 14.201,3.25 15.15,3.25 15.504,2.896 v1(16.25,2.896) 16.25,2.508 18.208,0.55 v2(21.575,0.55)
  Bottom Layer w0.1: U2.D8@13.8,5.3 13.843,5.3 14.101,5.558 v2(14.142,5.558) ; v2(14.2,6.325) 14.425,6.55 15.545,6.55 15.85,6.855 16.155,6.855 U2.G6@16.2,6.9 U2.G5@16.2,7.7
  Bottom Layer w0.18: C30.1@13.2,2.775 13.225,2.8 13.6,2.8 Y1.3@13.95,2.45
  Bottom Layer w0.2: DVDD.38@12.2,25.775 12.421,25.554 v1(12.421,24.825) ; 16.25,2.375 16.318,2.375 16.593,2.1 U6.A1@16.6,2.1 ; v1(20.922,24.716) 22.123,23.515 v1(22.123,18.925)
  Bottom Layer w0.3: C30.1@13.125,2.8 13.175,2.85 13.175,2.9 13.602,3.327 13.602,3.529 C16.1@13.688,3.615
  Bottom Layer w0.4: U2.C8@13,5.3 13,3.669 C15.1@12.971,3.64 12.983,3.627 13.676,3.627 C16.1@13.688,3.615 13.765,3.615 C16.1@13.825,3.675 ; 13.025,4.5 13.3,4.775 13.3,4.801 13.549,5.05 13.575,5.05 13.8,5.275 U2.D8@13.8,5.3 ; C40.1@16.225,2.921 v1(16.25,2.896) 16.25,2.375
  Bottom Layer w0.5: v1(10.989,31.296) 10.989,30.492 9.931,29.435 9.931,28.044 DVDD.38@12.2,25.775 ; v1(20.227,18.15) 20.227,17.639 20.745,17.121 TP_DVDD.44@20.745,16.85 ; TP_DVDD.44@20.777,16.85 20.777,14.298 21.925,13.15 21.925,7.66 cw(c21.925,7.41) 22.175,7.41 22.175,1.2 v2@21.55,0.575
EXT_CHG/VUSB: J4.47 J4.48 J6.47 J6.48 | length 3.8
  Top Layer w0.15: v1(5.125,2.45) 5.9,2.45 6.05,2.6 6.05,2.725 5.925,2.85 v1(5.575,2.85) J4.47@5.125,2.85
  Bottom Layer w0.15: J6.48@5.345,2.45 5.37,2.475 5.95,2.475 6.05,2.575 6.05,2.762 5.962,2.85 J6.47@5.345,2.85